# Altium PCB PCB1.PcbDoc (part 1 of 2)
Units mm, origin at the board's own origin, x right, y up, seen from the top; angles counter-clockwise.
Board outline 100 x 100 mm, 2 copper layers (Top Layer, Bottom Layer), stack 1.569 mm thick; 195 components, 137 nets, 444 pads, 96 vias.
Unrouted connection lines stored in the file: 120.
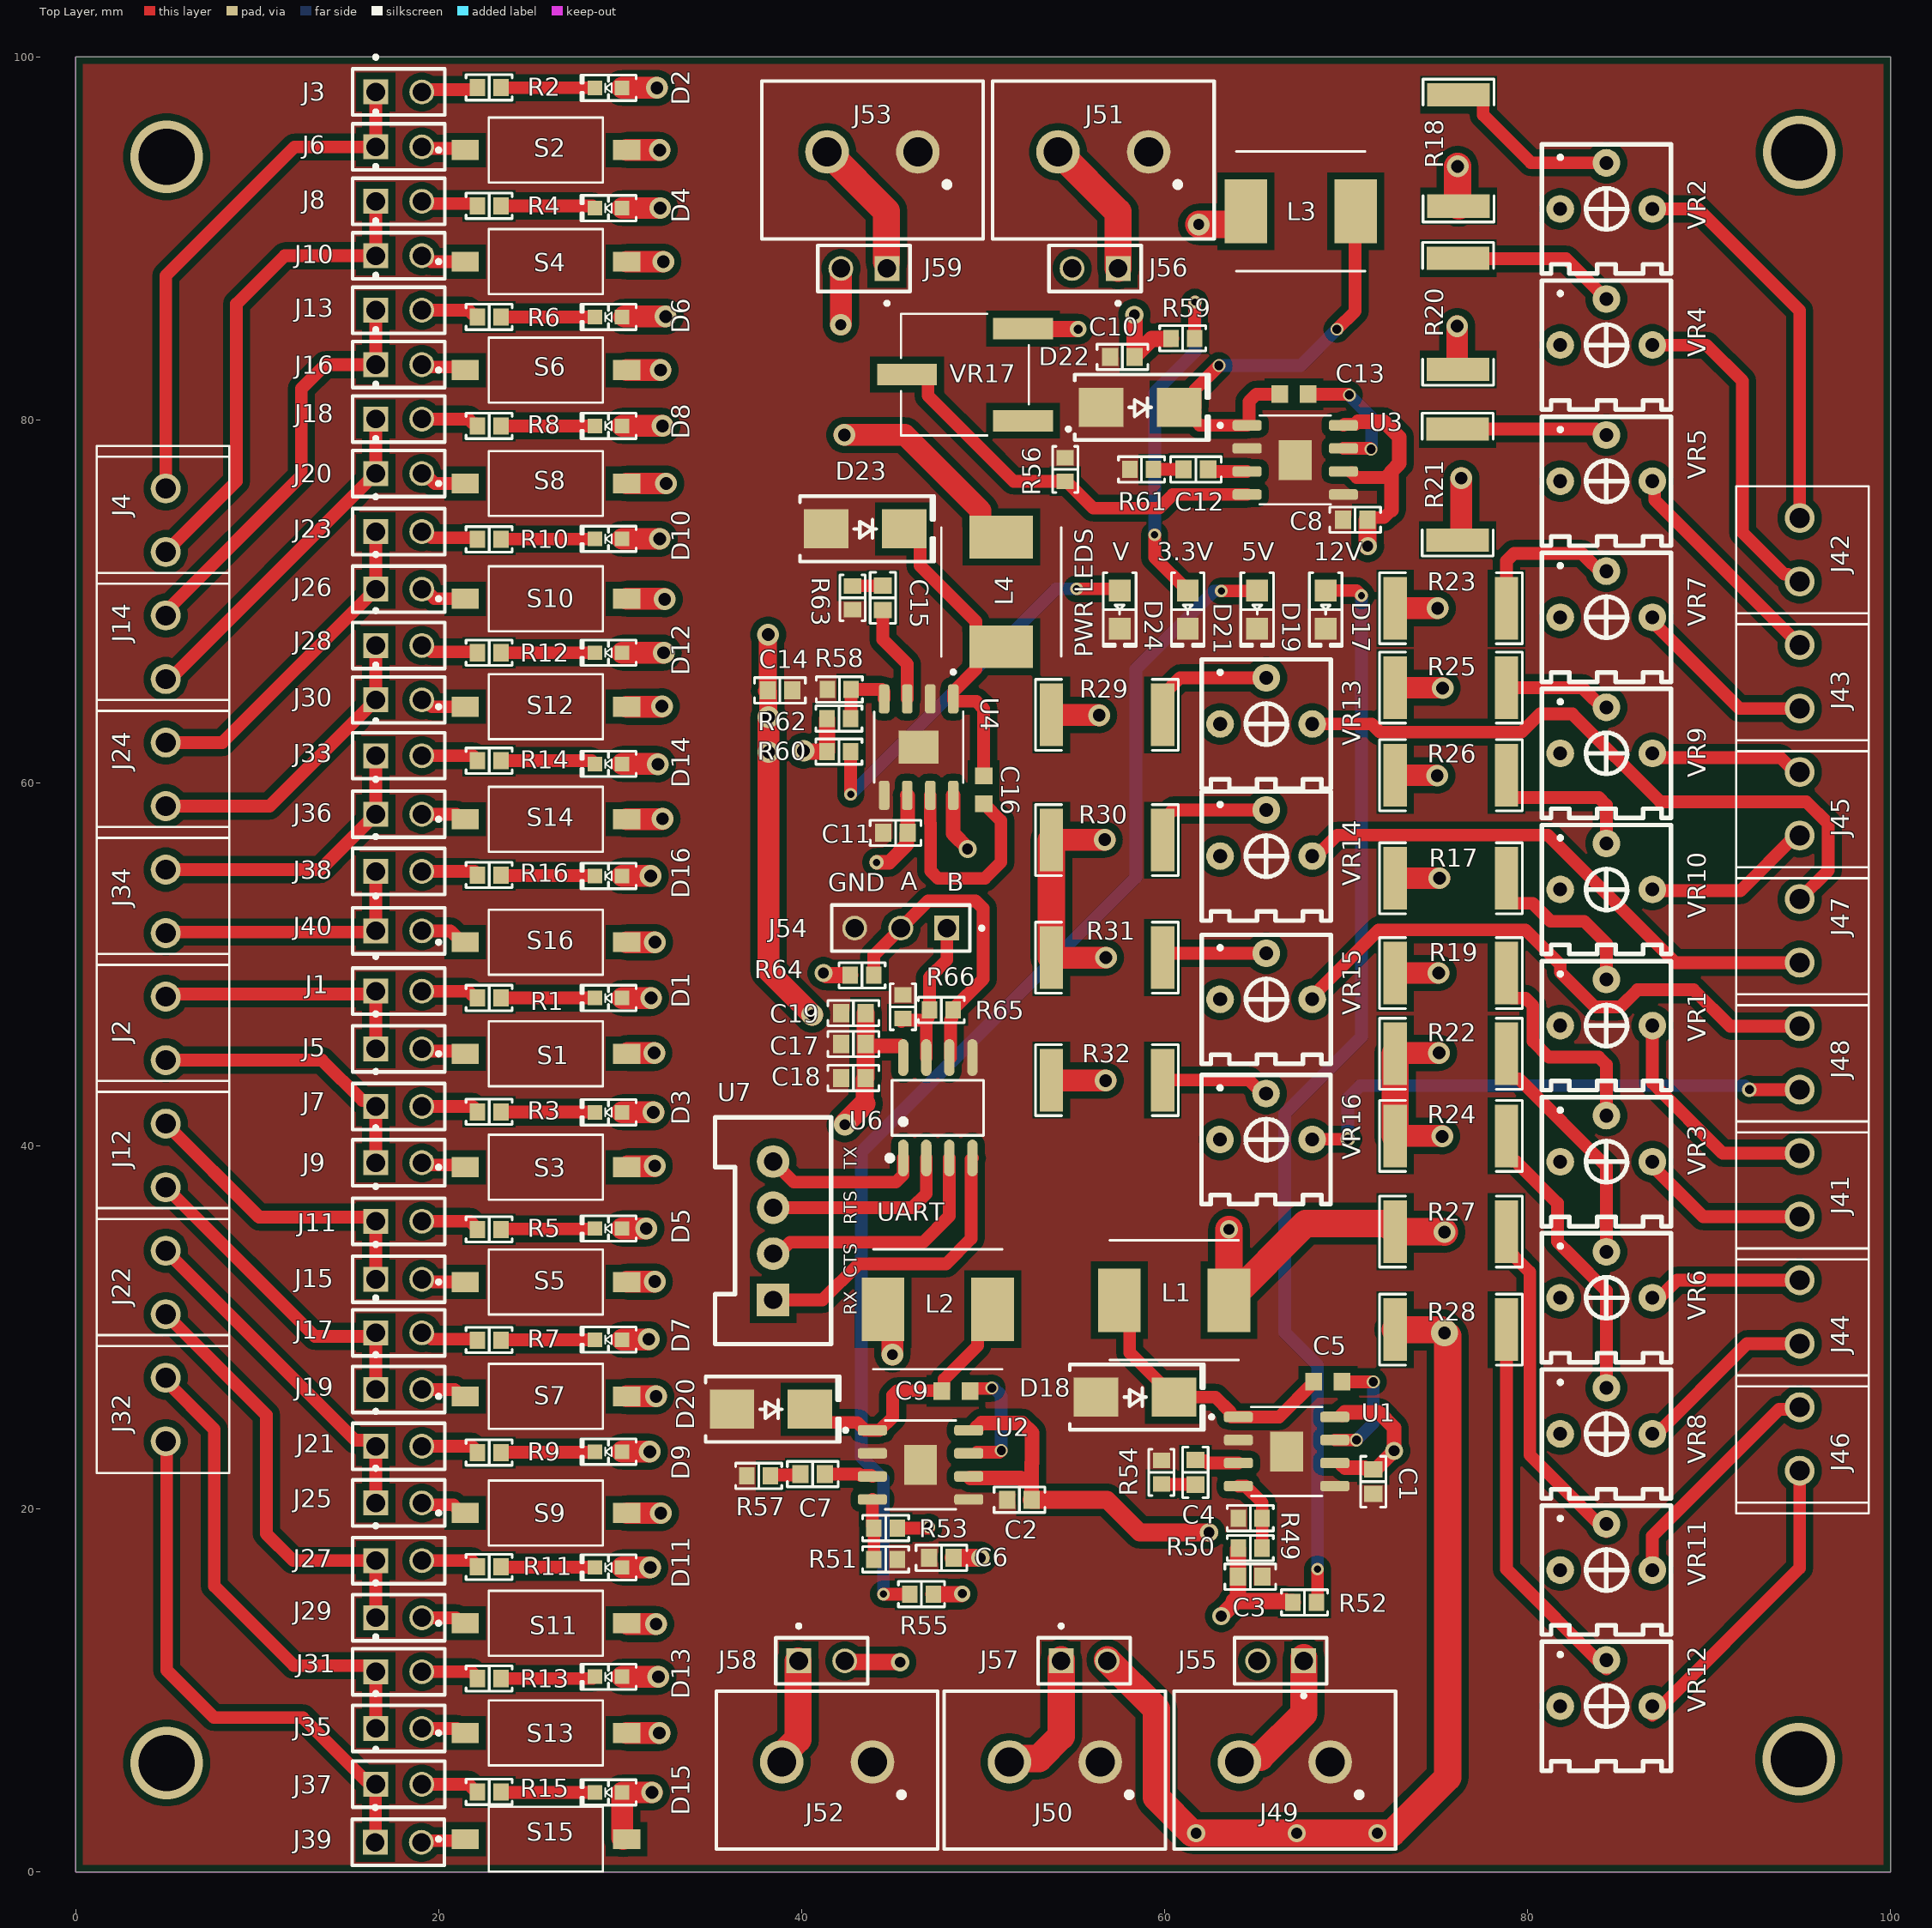
[diagram p0: Top Layer view]
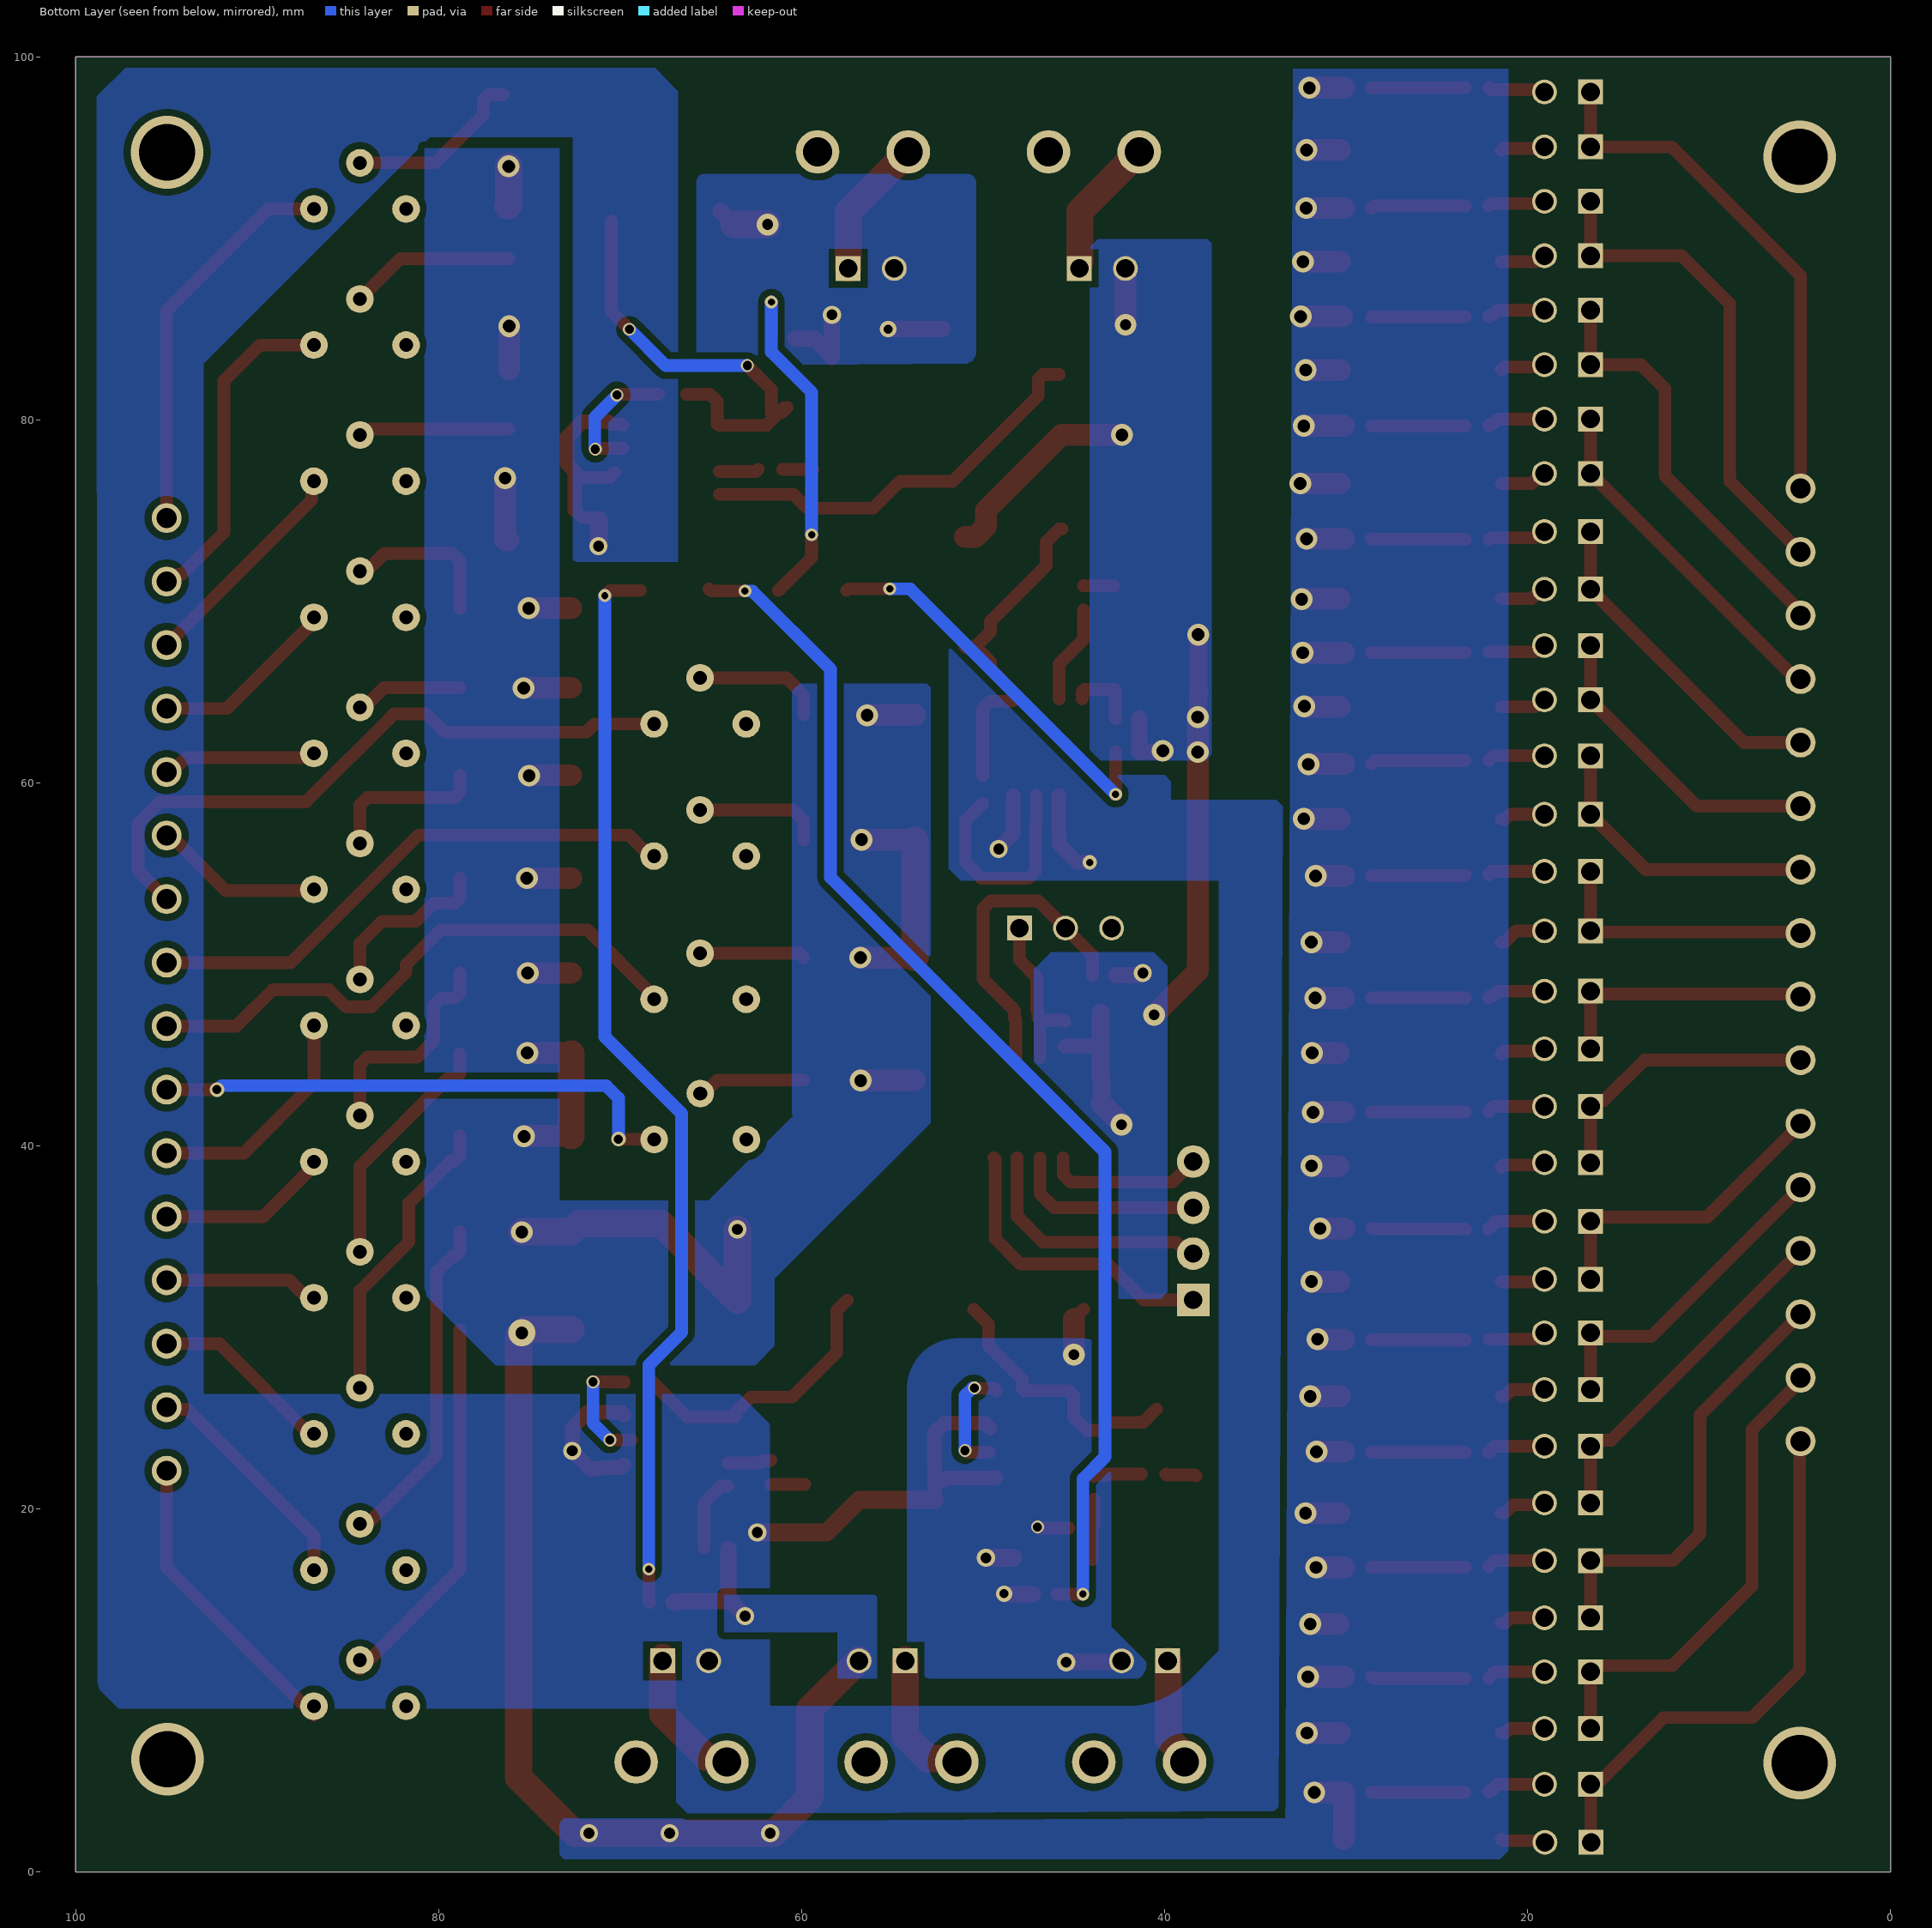
[diagram p1: Bottom Layer view, seen from below]
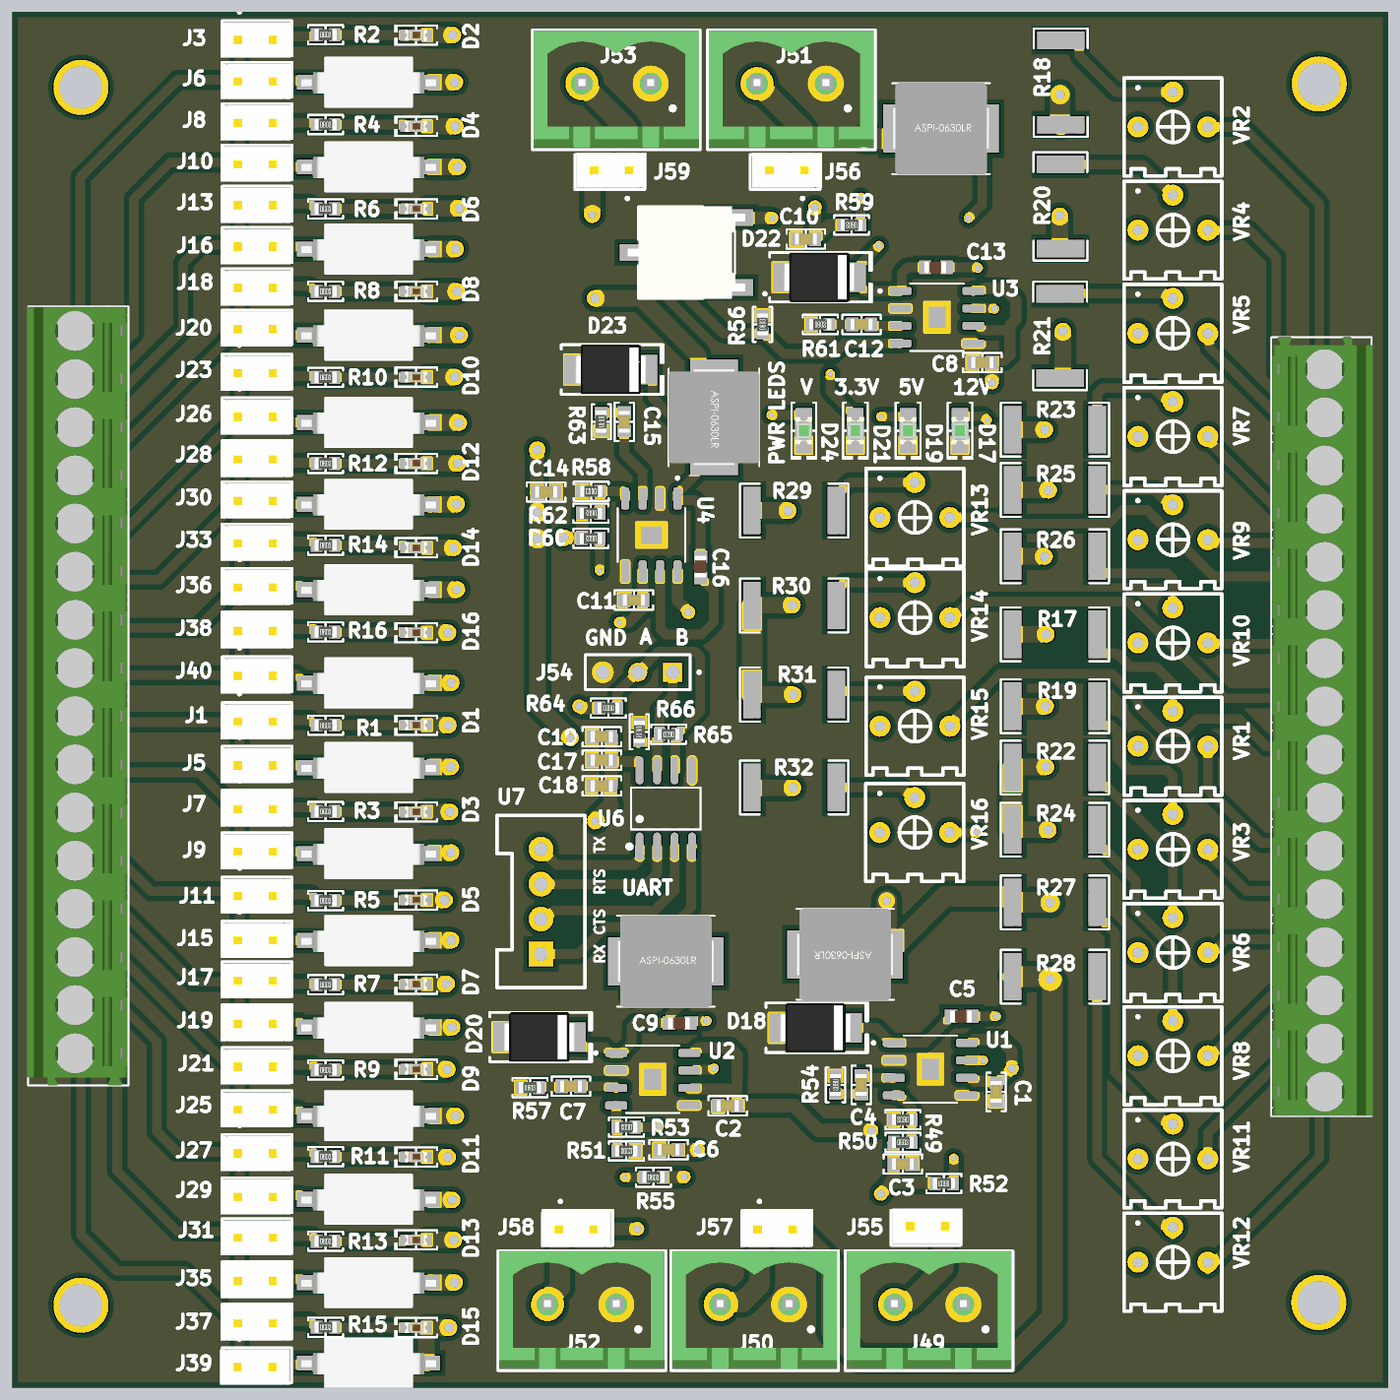
[diagram p3: 3D render of the assembled board from above, using the file's embedded part models]

## Layer stack, top to bottom
Top Solder: solder mask 0.0254, SM-001, Dk 4
Top Layer: signal copper 0.035
Dielectric 1: core 1.4986, Core-043, Dk 4.3
Bottom Layer: signal copper 0.035
Bottom Solder: solder mask 0.0254, SM-001, Dk 4

## Board outline
0,0 0,100 100,100 100,0

## Design rules (kind name [scope] priority, off if disabled: settings)
Clearance [All] p1: gap=0.381 ignorepadtopadclearanceinfootprint=FALSE except(0.2: Track-Hole; 0.3: Track-SMDPad; 0.4: Track-THPad; 0.5: Arc-Arc Arc-Track Arc-SMDPad Track-Track; 0.54: THPad-THPad; 0.6: Arc-THPad; 0.762: Arc-Via Track-Via Via-Via)
ComponentClearance [All] p1 off: gap=0.254 collisioncheckmode=3 verticalgap=0.254 showdistances=FALSE
HoleSize [All] p1: absolutevalues=TRUE maxlimit=6.3 minlimit=0.4 maxpercent=80.000 minpercent=20.000
HoleToHoleClearance [All] p1: gap=1 allowstackedmicrovias=TRUE
MinimumSolderMaskSliver [All] p1: minsoldermaskwidth=0.2
PermittedLayers [All] p1: toplayerpermitted=TRUE bottomlayerpermitted=TRUE
PlaneConnect [All] p1: planeconnectstyle=Direct reliefexpansion=0.508 reliefentries=4 reliefconductorwidth=0.254 reliefairgap=0.254
PolygonConnect [All] p1: connectstyle=Direct reliefconductorwidth=0.254 reliefentries=4 polygonreliefangle="90 Angle" airgapwidth=0.254
RoutingVias [All] p1: holewidth=0.6 width=0.9 viastyle="Through Hole" minholewidth=0.5 minwidth=0.8 maxholewidth=0.711 maxwidth=1.27
SilkToSilkClearance [All] p1: silktosilkclearance=0.2
SilkToSolderMaskClearance [IsPad] p1: minsilkscreentomaskgap=0.12 clearancetoexposedcopper=TRUE
SolderMaskExpansion [All] p1: expansion=0.102 istentingtop=FALSE soldermaskfromhole=TRUE
UnRoutedNet [All] p1: checkbadconnections=TRUE
Width [All] p1: maxlimit=1.5 minlimit=0.6 preferedwidth=0.7 bottomlayer_minwidth=0.7 bottomlayer_maxwidth=1 impedanceprofiledriven=TRUE impedanceprofileid={7F6526D8-940F-4284-9537-9007580CACC0} impedanceprofilevalue=50.000000 minimp=50.000000 maximp=50.000000 favimp=50.000000
22 further rules are at their usual default settings.

## Classes and differential pairs
component class rs485: C17 C18 C19 J54 R64 R65 R66 U6 U7

## Components (designator, comment, footprint, x,y, rotation, side; value= is the part's Value field where it differs from the comment)
C1 "10 µF" "CAP 0603_1608" 71.5,21.5 r270 top
C2 "10 µF" "CAP 0603_1608" 52,20.5 r180 top
C3 "47 µF" "CAP 0603_1608" 64.725,16.261 r180 top
C4 "6800 pF" "CAP 0603_1608" 61.7,22.011 r90 top
C5 "C0603C103J5REC7411" CAPC1608X87N 69,27 r0 top
C6 "47 µF" "CAP 0603_1608" 47.7,17.3 r0 top
C7 "6800 pF" "CAP 0603_1608" 40.605,21.915 r0 top
C8 "10 µF" "CAP 0603_1608" 70.5,74.5 r180 top
C9 "C0603C103J5REC7411" CAPC1608X87N 48.5,26.5 r0 top
C10 "47 µF" "CAP 0603_1608" 57.675,83.475 r0 top
C11 "10 µF" "CAP 0603_1608" 45.175,57.25 r180 top
C12 "6800 pF" "CAP 0603_1608" 61.725,77.275 r0 top
C13 "C0603C103J5REC7411" CAPC1608X87N 67.125,81.425 r0 top
C14 "47 µF" "CAP 0603_1608" 38.8,65.1 r180 top
C15 "6800 pF" "CAP 0603_1608" 44.475,70.2 r270 top
C16 "C0603C103J5REC7411" CAPC1608X87N 50.025,59.625 r270 top
C17 "10 µF" "CAP 0603_1608" 42.85,45.615 r0 top
C18 "0.1 µF" "CAP 0603_1608" 42.85,43.74 r0 top
C19 "0.1 µF" "CAP 0603_1608" 42.85,47.315 r0 top
D1 "Red" "LED 0603_1608 RED" 29.35,48.15 r180 top
D2 "Red" "LED 0603_1608 RED" 29.35,98.3 r180 top
D3 "Red" "LED 0603_1608 RED" 29.35,41.85 r180 top
D4 "Red" "LED 0603_1608 RED" 29.35,91.675 r180 top
D5 "Red" "LED 0603_1608 RED" 29.35,35.45 r180 top
D6 "Red" "LED 0603_1608 RED" 29.35,85.675 r180 top
D7 "Red" "LED 0603_1608 RED" 29.35,29.325 r180 top
D8 "Red" "LED 0603_1608 RED" 29.35,79.675 r180 top
D9 "Red" "LED 0603_1608 RED" 29.35,23.15 r180 top
D10 "Red" "LED 0603_1608 RED" 29.35,73.45 r180 top
D11 "Red" "LED 0603_1608 RED" 29.35,16.775 r180 top
D12 "Red" "LED 0603_1608 RED" 29.35,67.175 r180 top
D13 "Red" "LED 0603_1608 RED" 29.35,10.75 r180 top
D14 "Red" "LED 0603_1608 RED" 29.35,61.05 r180 top
D15 "Red" "LED 0603_1608 RED" 29.35,4.375 r180 top
D16 "Red" "LED 0603_1608 RED" 29.35,54.875 r180 top
D17 "Green" "LED 0805_2012 GREEN" 68.875,69.55 r270 top
D18 "MBRS140T3G" "DO214AA SMB" 58.375,26.161 r0 top
D19 "Green" "LED 0805_2012 GREEN" 65.1,69.55 r270 top
D20 "MBRS140T3G" "DO214AA SMB" 38.305,25.49 r0 top
D21 "Green" "LED 0805_2012 GREEN" 61.275,69.55 r270 top
D22 "MBRS140T3G" "DO214AA SMB" 58.65,80.7 r0 top
D23 "MBRS140T3G" "DO214AA SMB" 43.5,74 r0 top
D24 "Green" "LED 0805_2012 GREEN" 57.525,69.55 r270 top
J1 "HW-01-11-G-D-209-080" SAMTEC_HW-01-11-G-D-209-080#1 16.525,48.525 r270 top
J2 "691214110002S" 691214110002S 4.95,46.475 r90 top
J3 "HW-01-11-G-D-209-080" SAMTEC_HW-01-11-G-D-209-080#1 16.525,98.075 r270 top
J4 "691214110002S" 691214110002S 4.95,74.475 r90 top
J5 "HW-01-11-G-D-209-080" SAMTEC_HW-01-11-G-D-209-080#1 16.525,45.35 r270 top
J6 "HW-01-11-G-D-209-080" SAMTEC_HW-01-11-G-D-209-080#1 16.525,95.05 r270 top
J7 "HW-01-11-G-D-209-080" SAMTEC_HW-01-11-G-D-209-080#1 16.525,42.175 r270 top
J8 "HW-01-11-G-D-209-080" SAMTEC_HW-01-11-G-D-209-080#1 16.525,92.05 r270 top
J9 "HW-01-11-G-D-209-080" SAMTEC_HW-01-11-G-D-209-080#1 16.525,39.075 r270 top
J10 "HW-01-11-G-D-209-080" SAMTEC_HW-01-11-G-D-209-080#1 16.525,89.05 r270 top
J11 "HW-01-11-G-D-209-080" SAMTEC_HW-01-11-G-D-209-080#1 16.525,35.85 r270 top
J12 "691214110002S" 691214110002S 4.95,39.475 r90 top
J13 "HW-01-11-G-D-209-080" SAMTEC_HW-01-11-G-D-209-080#1 16.525,86.05 r270 top
J14 "691214110002S" 691214110002S 4.95,67.475 r90 top
J15 "HW-01-11-G-D-209-080" SAMTEC_HW-01-11-G-D-209-080#1 16.525,32.65 r270 top
J16 "HW-01-11-G-D-209-080" SAMTEC_HW-01-11-G-D-209-080#1 16.525,83.05 r270 top
J17 "HW-01-11-G-D-209-080" SAMTEC_HW-01-11-G-D-209-080#1 16.525,29.7 r270 top
J18 "HW-01-11-G-D-209-080" SAMTEC_HW-01-11-G-D-209-080#1 16.525,80.05 r270 top
J19 "HW-01-11-G-D-209-080" SAMTEC_HW-01-11-G-D-209-080#1 16.525,26.575 r270 top
J20 "HW-01-11-G-D-209-080" SAMTEC_HW-01-11-G-D-209-080#1 16.525,77.05 r270 top
J21 "HW-01-11-G-D-209-080" SAMTEC_HW-01-11-G-D-209-080#1 16.525,23.45 r270 top
J22 "691214110002S" 691214110002S 4.95,32.475 r90 top
J23 "HW-01-11-G-D-209-080" SAMTEC_HW-01-11-G-D-209-080#1 16.525,73.85 r270 top
J24 "691214110002S" 691214110002S 4.95,60.475 r90 top
J25 "HW-01-11-G-D-209-080" SAMTEC_HW-01-11-G-D-209-080#1 16.525,20.325 r270 top
J26 "HW-01-11-G-D-209-080" SAMTEC_HW-01-11-G-D-209-080#1 16.525,70.675 r270 top
J27 "HW-01-11-G-D-209-080" SAMTEC_HW-01-11-G-D-209-080#1 16.525,17.15 r270 top
J28 "HW-01-11-G-D-209-080" SAMTEC_HW-01-11-G-D-209-080#1 16.525,67.575 r270 top
J29 "HW-01-11-G-D-209-080" SAMTEC_HW-01-11-G-D-209-080#1 16.525,14 r270 top
J30 "HW-01-11-G-D-209-080" SAMTEC_HW-01-11-G-D-209-080#1 16.525,64.575 r270 top
J31 "HW-01-11-G-D-209-080" SAMTEC_HW-01-11-G-D-209-080#1 16.525,11.025 r270 top
J32 "691214110002S" 691214110002S 4.95,25.475 r90 top
J33 "HW-01-11-G-D-209-080" SAMTEC_HW-01-11-G-D-209-080#1 16.525,61.5 r270 top
J34 "691214110002S" 691214110002S 4.95,53.475 r90 top
J35 "HW-01-11-G-D-209-080" SAMTEC_HW-01-11-G-D-209-080#1 16.525,7.9 r270 top
J36 "HW-01-11-G-D-209-080" SAMTEC_HW-01-11-G-D-209-080#1 16.525,58.275 r270 top
J37 "HW-01-11-G-D-209-080" SAMTEC_HW-01-11-G-D-209-080#1 16.525,4.825 r270 top
J38 "HW-01-11-G-D-209-080" SAMTEC_HW-01-11-G-D-209-080#1 16.525,55.125 r270 top
J39 "HW-01-11-G-D-209-080" SAMTEC_HW-01-11-G-D-209-080#1 16.5,1.625 r270 top
J40 "HW-01-11-G-D-209-080" SAMTEC_HW-01-11-G-D-209-080#1 16.525,51.85 r270 top
J41 "691214110002S" 691214110002S 95,37.85 r270 top
J42 "691214110002S" 691214110002S 95,72.85 r270 top
J43 "691214110002S" 691214110002S 95,65.85 r270 top
J44 "691214110002S" 691214110002S 95,30.85 r270 top
J45 "691214110002S" 691214110002S 95,58.85 r270 top
J46 "691214110002S" 691214110002S 95,23.85 r270 top
J47 "691214110002S" 691214110002S 95,51.85 r270 top
J48 "691214110002S" 691214110002S 95,44.85 r270 top
J49 "691311700102" 691311700102 66.625,6.05 r180 top
J50 "691311700102" 691311700102 53.95,6.05 r180 top
J51 "691311700102" 691311700102 56.625,94.775 r180 top
J52 "691311700102" 691311700102 41.4,6.05 r180 top
J53 "691311700102" 691311700102 43.9,94.775 r180 top
J54 "TSW-103-26-F-S" SAMTEC_TSW-103-26-F-S 48,52 r180 top
J55 "HW-01-11-G-D-209-080" SAMTEC_HW-01-11-G-D-209-080#2 67.665,11.625 r90 top
J56 "HW-01-11-G-D-209-080" SAMTEC_HW-01-11-G-D-209-080#1 57.44,88.35 r90 top
J57 "HW-01-11-G-D-209-080" SAMTEC_HW-01-11-G-D-209-080#1 54.3,11.625 r270 top
J58 "HW-01-11-G-D-209-080" SAMTEC_HW-01-11-G-D-209-080#1 39.835,11.625 r270 top
J59 "HW-01-11-G-D-209-080" SAMTEC_HW-01-11-G-D-209-080#1 44.7,88.35 r90 top
L1 "ASPI-0630LR-150M-T15" IND_ASPI-0630LR-150M-T15 60.525,31.5 r180 top
L2 "ASPI-0630LR-150M-T15" IND_ASPI-0630LR-150M-T15 47.5,31 r0 top
L3 "ASPI-0630LR-150M-T15" IND_ASPI-0630LR-150M-T15 67.5,91.5 r0 top
L4 "ASPI-0630LR-150M-T15" IND_ASPI-0630LR-150M-T15 51,70.525 r270 top
R1 "1 kOhms" "RES 0603_1608" 22.775,48.15 r0 top
R2 "1 kOhms" "RES 0603_1608" 22.775,98.325 r0 top
R3 "1 kOhms" "RES 0603_1608" 22.775,41.875 r0 top
R4 "1 kOhms" "RES 0603_1608" 22.775,91.8 r0 top
R5 "1 kOhms" "RES 0603_1608" 22.775,35.4 r0 top
R6 "1 kOhms" "RES 0603_1608" 22.775,85.675 r0 top
R7 "1 kOhms" "RES 0603_1608" 22.775,29.3 r0 top
R8 "1 kOhms" "RES 0603_1608" 22.775,79.675 r0 top
R9 "1 kOhms" "RES 0603_1608" 22.775,23.1 r0 top
R10 "1 kOhms" "RES 0603_1608" 22.775,73.425 r0 top
R11 "1 kOhms" "RES 0603_1608" 22.775,16.8 r0 top
R12 "1 kOhms" "RES 0603_1608" 22.775,67.175 r0 top
R13 "1 kOhms" "RES 0603_1608" 22.775,10.65 r0 top
R14 "1 kOhms" "RES 0603_1608" 22.775,61.225 r0 top
R15 "1 kOhms" "RES 0603_1608" 22.775,4.4 r0 top
R16 "1 kOhms" "RES 0603_1608" 22.775,54.925 r0 top
R17 "422 Ohms" RES_422 75.775,54.75 r0 top
R18 "422 Ohms" RES_422 76.2,94.85 r90 top
R19 "422 Ohms" RES_422 75.775,49.525 r0 top
R20 "422 Ohms" RES_422 76.175,85.85 r90 top
R21 "422 Ohms" RES_422 76.15,76.441 r90 top
R22 "422 Ohms" RES_422 75.775,45.075 r0 top
R23 "422 Ohms" RES_422 75.775,69.625 r0 top
R24 "422 Ohms" RES_422 75.775,40.55 r0 top
R25 "422 Ohms" RES_422 75.775,65.25 r0 top
R26 "422 Ohms" RES_422 75.775,60.425 r0 top
R27 "422 Ohms" RES_422 75.775,35.275 r0 top
R28 "422 Ohms" RES_422 75.775,29.875 r0 top
R29 "422 Ohms" RES_422 56.825,63.75 r0 top
R30 "422 Ohms" RES_422 56.825,56.85 r0 top
R31 "422 Ohms" RES_422 56.825,50.375 r0 top
R32 "422 Ohms" RES_422 56.825,43.625 r0 top
R49 "10 kOhms" "RES 0603_1608" 64.725,19.486 r180 top
R50 "110 kOhms" "RES 0603_1608" 64.725,17.836 r0 top
R51 "30 kOhms" "RES 0603_1608" 44.63,17.215 r0 top
R52 "560 Ohms" "RES 0603_1608" 67.71,14.843 r180 top
R53 "120 kOhms" "RES 0603_1608" 44.63,18.94 r180 top
R54 "10 kOhms" "RES 0603_1608" 59.825,22.011 r270 top
R55 "165 Ohms" "RES 0603_1608" 46.6,15.3 r0 top
R56 "30 kOhms" "RES 0603_1608" 54.525,77.275 r90 top
R57 "10 kOhms" "RES 0603_1608" 37.63,21.815 r0 top
R58 "27 kOhms" "RES 0603_1608" 42.075,65.15 r180 top
R59 "866 Ohms" "RES 0603_1608" 61,84.5 r180 top
R60 "62 kOhms" "RES 0603_1608" 42.05,63.55 r180 top
R61 "10 kOhms" "RES 0603_1608" 58.725,77.275 r0 top
R62 "110 Ohms" "RES 0603_1608" 42.05,61.725 r180 top
R63 "10 kOhms" "RES 0603_1608" 42.8,70.2 r90 top
R64 "475 Ohms" "RES 0603_1608" 43.325,49.4 r180 top
R65 "140 Ohms" "RES 0603_1608" 47.697,47.49 r180 top
R66 "475 Ohms" "RES 0603_1608" 45.575,47.662 r270 top
S1 "KAE01SGGT" SW_KAE01SGGT 25.9,45.075 r0 top
S2 "KAE01SGGT" SW_KAE01SGGT 25.9,94.875 r0 top
S3 "KAE01SGGT" SW_KAE01SGGT 25.9,38.825 r0 top
S4 "KAE01SGGT" SW_KAE01SGGT 25.9,88.725 r0 top
S5 "KAE01SGGT" SW_KAE01SGGT 25.9,32.5 r0 top
S6 "KAE01SGGT" SW_KAE01SGGT 25.9,82.75 r0 top
S7 "KAE01SGGT" SW_KAE01SGGT 25.9,26.2 r0 top
S8 "KAE01SGGT" SW_KAE01SGGT 25.9,76.5 r0 top
S9 "KAE01SGGT" SW_KAE01SGGT 25.9,19.775 r0 top
S10 "KAE01SGGT" SW_KAE01SGGT 25.9,70.15 r0 top
S11 "KAE01SGGT" SW_KAE01SGGT 25.9,13.7 r0 top
S12 "KAE01SGGT" SW_KAE01SGGT 25.9,64.2 r0 top
S13 "KAE01SGGT" SW_KAE01SGGT 25.9,7.65 r0 top
S14 "KAE01SGGT" SW_KAE01SGGT 25.9,58 r0 top
S15 "KAE01SGGT" SW_KAE01SGGT 25.9,1.8 r0 top
S16 "KAE01SGGT" SW_KAE01SGGT 25.9,51.225 r0 top
U1 "BD9876AEFJ-E2" SOIC127P600X100-9N 66.725,23.161 r0 top
U2 "BD9876AEFJ-E2" SOIC127P600X100-9N 46.55,22.425 r0 top
U3 "BD9876AEFJ-E2" SOIC127P600X100-9N 67.2,77.8 r0 top
U4 "BD9876AEFJ-E2" SOIC127P600X100-9N 46.45,61.975 r270 top
U6 "SP3485" SP3485 47.5,42.1 r0 top
U7 "Con1x4_WireToWire" Con1x4_WireToWire 38.425,31.52 r270 top
VR1 "CT6EP202" CT6EP202 84.345,46.629 r0 top
VR2 "CT6EP202" CT6EP202 84.345,91.629 r0 top
VR3 "CT6EP202" CT6EP202 84.345,39.129 r0 top
VR4 "CT6EP202" CT6EP202 84.345,84.129 r0 top
VR5 "CT6EP202" CT6EP202 84.345,76.629 r0 top
VR6 "CT6EP202" CT6EP202 84.345,31.629 r0 top
VR7 "CT6EP202" CT6EP202 84.345,69.129 r0 top
VR8 "CT6EP202" CT6EP202 84.345,24.129 r0 top
VR9 "CT6EP202" CT6EP202 84.345,61.629 r0 top
VR10 "CT6EP202" CT6EP202 84.345,54.129 r0 top
VR11 "CT6EP202" CT6EP202 84.345,16.629 r0 top
VR12 "CT6EP202" CT6EP202 84.345,9.129 r0 top
VR13 "CT6EP202" CT6EP202 65.6,63.25 r0 top
VR14 "CT6EP202" CT6EP202 65.6,55.97 r0 top
VR15 "CT6EP202" CT6EP202 65.6,48.077 r0 top
VR16 "CT6EP202" CT6EP202 65.59,40.35 r0 top
VR17 "3361P-1-504GLF" TRIM_3361P-1-504GLF 49,82.5 r180 top

## Footprints (in the part's own frame and the unit in brackets; to place one, negate y for a bottom-side part, rotate by r counter-clockwise, add the part's x,y. Pads: shape width x height; smd on the part's side, far side on the other; paste and mask are expansions set on the pad)
691214110002S [mm]
  round 1.65 hole 1.1: 1(-1.75,0) 2(1.75,0)
  silkscreen extent -3.5,-3.5 4.1,3.8, body extent -3.52,-3.42 4.08,3.88, height 9.1
691311700102 [mm]
  round 2.4 hole 1.6: 1(-2.5,0) 2(2.5,0)
  silkscreen extent -6.1,-3.9 6.1,4.8, body extent -6,-3.87 6,4.63, height 6
"CAP 0603_1608" [mm] "Chip Capacitor, 2-Leads, Body 1.60x0.80mm, IPC Medium Density"
  rect 0.9x1 smd: 1(-0.675,0) 2(0.675,0)
  silkscreen extent -1.4,-0.7 1.4,0.7, body extent -0.8,-0.41 0.8,0.41, height 0.82
CAPC1608X87N [mm]
  rect 0.92x0.97 smd: 1(-0.775,0) 2(0.775,0)
  body extent -0.85,-0.44 0.75,0.43, height 0.81
Con1x4_WireToWire [mm]
  rect 1.8x1.8 hole 1: 1(0,0)
  round 1.8 hole 1: 2(-2.54,0) 3(-5.08,0) 4(-7.62,0)
  silkscreen extent -10.06,-3.2 2.44,3.2
CT6EP202 [mil]
  round 60 hole 30: 1(-100,0) 2(0,100) 3(100,0)
  silkscreen extent -140,-140 140,140
"DO214AA SMB" [mm] "Molded Diode, 2-Leads, Body 4.31x3.62mm, IPC Medium Density"
  rect 2.45x2.15 smd: 1(-2.15,0) 2(2.15,0)
  silkscreen extent -3.6,-1.8 3.8,1.8, body extent -2.6,-1.8 2.6,1.8, height 2.4
IND_ASPI-0630LR-150M-T15 [mm]
  rect 2.35x3.5 smd: 1(-3.025,0) 2(3.025,0)
  silkscreen extent -3.55,-3.3 3.55,3.3, body extent -3.6,-3.32 3.6,3.32, height 1.35
"LED 0603_1608 RED" [mm] "Chip Diode, 2-Leads, Body 1.60x0.80mm, IPC Medium Density"
  rect 0.8x0.8 smd: 1(-0.75,0) 2(0.75,0)
  silkscreen extent -1.52,-0.7 1.52,0.7, body extent -0.8,-0.4 0.8,0.4, height 0.53
"LED 0805_2012 GREEN" [mm] "Chip Diode, 2-Leads, Body 2.00x1.25mm, IPC Medium Density"
  rect 1.2x1.2 smd: 1(-1.05,0) 2(1.05,0)
  silkscreen extent -2.03,-0.9 2.03,0.9, body extent -1,-0.62 1,0.63, height 0.9
"RES 0603_1608" [mm] "Chip Resistor, 2-Leads, Body 1.60x0.80mm, IPC Medium Density"
  rect 0.85x0.95 smd: 1(-0.65,0) 2(0.65,0)
  silkscreen extent -1.27,-0.7 1.27,0.7, body extent -0.8,-0.4 0.8,0.4, height 0.45
RES_422 [mm]
  rect 1.283x3.456 smd: 1(-3.066,0) 2(3.066,0)
  silkscreen extent -3.94,-1.96 3.94,1.96
SAMTEC_HW-01-11-G-D-209-080#1 [mm]
  rect 1.37x1.37 / inner round 1.37 / far side rect 1.37x1.37 hole 1.02: 01(0,0)
  round 1.37 hole 1.02: 02(0,2.54)
  silkscreen extent -2.02,-1.27 1.27,3.81, body extent -1.14,-1.4 1.4,3.68, height 21.6
SAMTEC_HW-01-11-G-D-209-080#2 [mm]
  rect 1.37x1.37 hole 1.02: 01(0,0)
  round 1.37 hole 1.02: 02(0,2.54)
  silkscreen extent -2.02,-1.27 1.27,3.81, body extent -1.14,-1.4 1.4,3.68, height 21.6
SAMTEC_TSW-103-26-F-S [mm]
  rect 1.37x1.37 hole 1.02: 01(0,0)
  round 1.37 hole 1.02: 02(2.54,0) 03(5.08,0)
  silkscreen extent -2.02,-1.27 6.35,1.27
SOIC127P600X100-9N [mm]
  rrect50% 1.61x0.58 smd: 1(-2.655,1.905) 2(-2.655,0.635) 3(-2.655,-0.635) 4(-2.655,-1.905) 5(2.655,-1.905) 6(2.655,-0.635) 7(2.655,0.635) 8(2.655,1.905)
  rect 1.8x2.2 smd paste-2: 9(0,0)
  silkscreen extent -4.23,-2.45 1.95,2.45
SP3485 [mm]
  oval 0.574x2.036 smd: 1(-1.905,-2.768) 2(-0.635,-2.768) 3(0.635,-2.768) 4(1.905,-2.768) 5(1.905,2.768) 6(0.635,2.768) 7(-0.635,2.768) 8(-1.905,2.768)
  silkscreen extent -2.79,-2.92 2.53,1.52
SW_KAE01SGGT [mm]
  rect 1.5x1.1 smd: 1(-4.45,0) 2(4.45,0)
  silkscreen extent -6.01,-1.79 3.15,1.79, body extent -4.9,-1.79 4.9,1.79, height 3.13
TRIM_3361P-1-504GLF [mm]
  rect 3.3x1.19 smd: 1(-3.2,2.54) 2(3.2,0) 3(-3.2,-2.54)
  silkscreen extent -5.8,-3.35 3.52,3.35, body extent -4.27,-3.35 4.27,3.35, height 5.84

## Part data
C1 C2 C8 C11: library part 0603DD106MAT2A, "CAP CER 10UF 35V X5R 0603", Device Package="0603 (1608 Metric)", Manufacturer="KYOCERA AVX", Operating Temperature="-55°C ~ 85°C", Supplier Part Number 1=478-0603DD106MAT2ACT-ND, Temperature Coefficient=X5R, Tolerance=±20%, Voltage - Rated=35V, Applications="General Purpose", Capacitance="10 µF", ComponentLink2Description="DigiKey Link", ComponentLink2URL=https://www.digikey.com/en/products/detail/kyocera-avx/0603DD106MAT2A/16602926, lastupdated="08/03/2023 8:07:23 pm", Lifecycle Status=Active, Minimum Order=1, Mounting Type="Surface Mount, MLCC", Package / Case="0603 (1608 Metric)", Packaging=TapeAndReel, Part Number=0603DD106MAT2A, Part Status=Active, partid=46895, price=0.05, Series=-, Size / Dimension="0.063\" L x 0.031\" W (1.60mm x 0.80mm)", Supplier 1=DigiKey
C3 C6 C10 C14: library part GRM188R60J476ME15D, "CAP CER 47UF 6.3V X5R 0603", Device Package="0603 (1608 Metric)", Manufacturer="Murata Electronics", Operating Temperature="-55°C ~ 85°C", Supplier Part Number 1=490-13247-1-ND, Temperature Coefficient=X5R, Tolerance=±20%, Voltage - Rated=6.3V, Applications="General Purpose", Capacitance="47 µF", ComponentLink1Description=Datasheet, ComponentLink1URL=https://www.murata.com/~/media/webrenewal/support/library/catalog/products/capacitor/mlcc/c02e.ashx?la=en-us, ComponentLink2Description="DigiKey Link", ComponentLink2URL=https://www.digikey.com/en/products/detail/murata-electronics/GRM188R60J476ME15D/5877410, lastupdated="08/03/2023 8:08:50 pm", Lifecycle Status=Active, Minimum Order=1, Mounting Type="Surface Mount, MLCC", Package / Case="0603 (1608 Metric)", Packaging=TapeAndReel, Part Number=GRM188R60J476ME15D, Part Status=Active, partid=5468, price=0.10, Series=GRM, Size / Dimension="0.063\" L x 0.031\" W (1.60mm x 0.80mm)", Supplier 1=DigiKey, Thickness (Max)="0.039\" (1.00mm)"
C4 C7 C12 C15: library part EMK107SD682JA-T, "CAP CER 6800PF 16V 0603", Device Package="0603 (1608 Metric)", Manufacturer="Taiyo Yuden", Operating Temperature="-55°C ~ 125°C", Supplier Part Number 1=587-1089-1-ND, Tolerance=±5%, Voltage - Rated=16V, Applications="General Purpose", Capacitance="6800 pF", ComponentLink1Description=Datasheet, ComponentLink1URL=http://www.yuden.co.jp/productdata/catalog/mlcc07_e.pdf, ComponentLink2Description="DigiKey Link", ComponentLink2URL=https://www.digikey.com/en/products/detail/taiyo-yuden/EMK107SD682JA-T/930441, Features="Low Distortion", lastupdated="08/03/2023 8:08:44 pm", Lifecycle Status=Active, Minimum Order=1, Mounting Type="Surface Mount, MLCC", Package / Case="0603 (1608 Metric)", Packaging=TapeAndReel, Part Number=EMK107SD682JA-T, Part Status=Active, partid=7463, price=0.07, Series=CFCAP™, Size / Dimension="0.063\" L x 0.031\" W (1.60mm x 0.80mm)", Supplier 1=DigiKey, Thickness (Max)="0.035\" (0.90mm)"
C5 C9 C13 C16: "10000pF Â±5% 50V Ceramic Capacitor X7R 0603 (1608 Metric)", Package="1608 KEMET", Availability=Unavailable, DigiKey-Purchase-URL=https://snapeda.com/shop?store=DigiKey&id=2066766, MF=KEMET, MP=C0603C103J5REC7411, price=None, SnapEDA_Link=https://www.snapeda.com/parts/C0603C103J5REC7411/KEMET/view-part/2066766/?ref=snap
C17: library part GRM188R60J106ME47D, "CAP CER 10UF 6.3V X5R 0603", Device Package="0603 (1608 Metric)", Manufacturer="Murata Electronics", Operating Temperature="-55°C ~ 85°C", Supplier Part Number 1=490-3896-1-ND, Temperature Coefficient=X5R, Tolerance=±20%, Voltage - Rated=6.3V, Applications="General Purpose", Capacitance="10 µF", ComponentLink1Description=Datasheet, ComponentLink1URL=https://www.murata.com/~/media/webrenewal/support/library/catalog/products/capacitor/mlcc/c02e.ashx?la=en-us, ComponentLink2Description="DigiKey Link", ComponentLink2URL=https://www.digikey.com/en/products/detail/murata-electronics/GRM188R60J106ME47D/965910, lastupdated="08/03/2023 8:08:59 pm", Lifecycle Status=Active, Minimum Order=1, Mounting Type="Surface Mount, MLCC", Package / Case="0603 (1608 Metric)", Packaging=TapeAndReel, Part Number=GRM188R60J106ME47D, Part Status=Active, partid=2351, price=0.02, Series=GRM, Size / Dimension="0.063\" L x 0.031\" W (1.60mm x 0.80mm)", Supplier 1=DigiKey, Thickness (Max)="0.035\" (0.90mm)"
C18 C19: library part 6R3X14W104MV4T, "CAP CER 0.1UF 6.3V X7R 0603", Device Package="0603 (1608 Metric)", Manufacturer="Johanson Dielectrics Inc.", Operating Temperature="-55°C ~ 125°C", Supplier Part Number 1=709-1009-1-ND, Temperature Coefficient=X7R, Tolerance=±20%, Voltage - Rated=6.3V, Applications="Bypass, Decoupling", Capacitance="0.1 µF", ComponentLink1Description=Datasheet, ComponentLink1URL=https://www.johansondielectrics.com/downloads/x2y-filter-and-decoupling-capacitors.pdf, ComponentLink2Description="DigiKey Link", ComponentLink2URL=https://www.digikey.com/en/products/detail/johanson-dielectrics-inc/6R3X14W104MV4T/1556331, Features="Low ESL (X2Y)", lastupdated="08/03/2023 8:08:58 pm", Lifecycle Status=Active, Minimum Order=1, Mounting Type="Surface Mount, MLCC", Package / Case="0603 (1608 Metric)", Packaging=TapeAndReel, Part Number=6R3X14W104MV4T, Part Status=Active, partid=2650, price=0.08, Series=X2Y®, Size / Dimension="0.064\" L x 0.035\" W (1.63mm x 0.89mm)", Supplier 1=DigiKey, Thickness (Max)="0.026\" (0.66mm)"
D1 D2 D3 D4 D5 D6 D7 D8 D9 D10 D11 D12 D13 D14 D15 D16: library part 19-213SDRC/S259/TR8, "LED RED CLEAR 2SMD", Current - Test=10mA, Device Package="0603 (1608 Metric)", Lens Color=Colorless, Manufacturer="Everlight Electronics Co Ltd", Supplier Device Package=2-SMD, Supplier Part Number 1=1080-1580-1-ND, Voltage - Forward (Vf) (Typ)=2V, Color=Red, ComponentLink1Description=Datasheet, ComponentLink1URL=//media.digikey.com/pdf/Data%20Sheets/Everlight%20PDFs/19-213SDRC-S259-TR8.pdf, ComponentLink2Description="DigiKey Link", ComponentLink2URL=http://digikey.com/product-detail/en/everlight-electronics-co-ltd/19-213SDRC-S259-TR8/1080-1580-1-ND/8535303, Configuration=Standard, Height (Max)=0.70mm, lastupdated="08/03/2023 8:58:11 pm", Lens Size="1.20mm x 0.80mm", Lens Style="Rectangle with Flat Top", Lens Transparency=Clear, Lifecycle Status=Active, Minimum Order=1, Mounting Type="Surface Mount", Package / Case="0603 (1608 Metric)", Packaging=TapeAndReel, Part Number=19-213SDRC/S259/TR8, Part Status=Active, partid=372, price=0.06, Series=-, Size / Dimension="1.60mm L x 0.80mm W", Supplier 1=DigiKey, Viewing Angle=120°, Wavelength - Peak=650nm
D17 D19 D21 D24: library part QTLP630C4TR, "LED GREEN CLEAR 0805 SMD", Current - Test=20mA, Device Package="0805 (2012 Metric)", Lens Color=Colorless, Manufacturer="Everlight Electronics Co Ltd", Millicandela Rating=10mcd, Supplier Device Package=0805, Supplier Part Number 1=1080-1411-1-ND, Voltage - Forward (Vf) (Typ)=2.1V, Color=Green, ComponentLink1Description=Datasheet, ComponentLink1URL=//media.digikey.com/PDF/Data%20Sheets/Everlight%20PDFs/QTLP630-2.pdf, ComponentLink2Description="DigiKey Link", ComponentLink2URL=https://www.digikey.com/en/products/detail/everlight-electronics-co-ltd/QTLP630C4TR/2675902, Configuration=Standard, Height (Max)=1.20mm, lastupdated="08/03/2023 8:58:32 pm", Lens Size="1.40mm x 1.25mm", Lens Style="Rectangle with Flat Top", Lens Transparency=Clear, Lifecycle Status=Active, Minimum Order=1, Mounting Type="Surface Mount", Package / Case="0805 (2012 Metric)", Packaging=TapeAndReel, Part Number=QTLP630C4TR, Part Status=Active, partid=240, price=0.04, Series=-, Size / Dimension="2.00mm L x 1.25mm W", Supplier 1=DigiKey, Viewing Angle=140°, Wavelength - Dominant=570nm, Wavelength - Peak=565nm
D18 D20 D22 D23: "DIODE SCHOTTKY 40V 1A SMB", Current - Average Rectified (Io)=1A, Current - Reverse Leakage @ Vr="1mA @ 40V", Manufacturer="ON Semiconductor", Operating Temperature - Junction="-65°C ~ 125°C", Package / Case="DO-214AA, SMB", Supplier Device Package=SMB, Supplier Part Number 1=MBRS140T3GOSCT-ND, Voltage - DC Reverse (Vr) (Max)=40V, Voltage - Forward (Vf) (Max) @ If="600mV @ 1A", ComponentLink1Description=Datasheet, ComponentLink1URL=https://www.onsemi.com/pub/Collateral/MBRS140T3-D.PDF, ComponentLink2Description="DigiKey Link", ComponentLink2URL=http://digikey.com/product-detail/en/on-semiconductor/MBRS140T3G/MBRS140T3GOSCT-ND/918002, Diode Type=Schottky, lastupdated="08/03/2023 8:53:35 pm", Lifecycle Status=Active, Minimum Order=1, Mounting Type="Surface Mount", Packaging=TapeAndReel, Part Number=MBRS140T3G, Part Status=Active, partid=1387, price=0.08, Series=-, Speed="Fast Recovery =< 500ns, > 200mA (Io)", Supplier 1=DigiKey
J1 J3 J5 J6 J7 J8 J9 J10 J11 J13 J15 J16 J17 J18 J19 J20 J21 J23 J25 J26 J27 J28 J29 J30 J31 J33 J35 J36 J37 J38 J39 J40 J55 J56 J57 J58 J59: "CONN HDR 2POS STACK T/H", Package=None, Availability="In Stock", Check_prices=https://www.snapeda.com/parts/HW-01-11-G-D-209-080/Samtec/view-part/?ref=eda, MF=Samtec, MP=HW-01-11-G-D-209-080, price=None, Purchase-URL=https://pricing.snapeda.com/search/part/HW-01-11-G-D-209-080/?ref=eda, SnapEDA_Link=https://www.snapeda.com/parts/HW-01-11-G-D-209-080/Samtec/view-part/?ref=snap
J2 J4 J12 J14 J22 J24 J32 J34 J41 J42 J43 J44 J45 J46 J47 J48: "2 Position Wire to Board Terminal Block Horizontal with Board 0.138 (3.50mm) Through Hole", Package=None, Availability="In Stock", Check_prices=https://www.snapeda.com/parts/691214110002S/Wurth+Elektronik/view-part/?ref=eda, MF="WÃ¼rth Elektronik", MP=691214110002S, price=None, Purchase-URL=https://pricing.snapeda.com/search/part/691214110002S/?ref=eda, SnapEDA_Link=https://www.snapeda.com/parts/691214110002S/Wurth+Elektronik/view-part/?ref=snap
J49 J50 J51 J52 J53: "2 Position Terminal Block Header, Male Pins, Shrouded (4 Side) 0.197 (5.00mm) Vertical - Through Hole", Package=None, Availability="In Stock", Check_prices=https://www.snapeda.com/parts/691311700102/Wurth+Elektronik/view-part/?ref=eda, MF="WÃ¼rth Elektronik", MP=691311700102, price=None, Purchase-URL=https://pricing.snapeda.com/search/part/691311700102/?ref=eda, SnapEDA_Link=https://www.snapeda.com/parts/691311700102/Wurth+Elektronik/view-part/?ref=snap
J54: Package=None, Availability=Unavailable, MP=TSW-103-26-F-S, price=None
L1 L2 L3 L4: "15 ÂµH Shielded Molded Inductor 3 A 120mOhm Max Nonstandard", Package="Nonstandard Abracon LLC", Check_prices=https://www.snapeda.com/parts/ASPI-0630LR-150M-T15/Abracon+LLC/view-part/?ref=eda, Digi-Key_Part_Number=ASPI-0630LR-150M-T15TR-ND, MF="Abracon LLC", MP=ASPI-0630LR-150M-T15, Purchase-URL=https://pricing.snapeda.com/search/part/ASPI-0630LR-150M-T15/?ref=eda, SnapEDA_Link=https://www.snapeda.com/parts/ASPI-0630LR-150M-T15/Abracon+LLC/view-part/?ref=snap
R1 R2 R3 R4 R5 R6 R7 R8 R9 R10 R11 R12 R13 R14 R15 R16: library part CPF0603B1K0E, "RES SMD 1K OHM 0.1% 1/16W 0603", Device Package="0603 (1608 Metric)", Manufacturer="TE Connectivity Passive Product", Operating Temperature="-55°C ~ 155°C", Power (Watts)="0.063W, 1/16W", Supplier Device Package=0603, Supplier Part Number 1=A119887CT-ND, Temperature Coefficient=±25ppm/°C, Tolerance=±0.1%, ComponentLink1Description=Datasheet, ComponentLink1URL=https://www.te.com/commerce/DocumentDelivery/DDEController?Action=srchrtrv&DocNm=1773200&DocType=DS&DocLang=English, ComponentLink2Description="DigiKey Link", ComponentLink2URL=https://www.digikey.com/en/products/detail/te-connectivity-passive-product/CPF0603B1K0E/2390473, Composition="Thin Film", Height - Seated (Max)="0.022\" (0.55mm)", lastupdated="08/03/2023 8:30:18 pm", Lifecycle Status=Active, Minimum Order=1, Number of Terminations=2, Package / Case="0603 (1608 Metric)", Packaging=TapeAndReel, Part Number=CPF0603B1K0E, Part Status=Active, partid=4877, price=0.09, Resistance="1 kOhms", Series="CPF, Neohm", Size / Dimension="0.061\" L x 0.031\" W (1.55mm x 0.80mm)", Supplier 1=DigiKey
R17 R18 R19 R20 R21 R22 R23 R24 R25 R26 R27 R28 R29 R30 R31 R32: library part RES_422, "1W Thick Film Resistors 200V ±100ppm/℃ ±1% -55℃~+155℃ 422Ω 2512 Chip Resistor - Surface Mount ROHS"
R49: library part RT0603FRE0710KL, "RES SMD 10K OHM 1% 1/10W 0603", Device Package="0603 (1608 Metric)", Manufacturer=Yageo, Operating Temperature="-55°C ~ 155°C", Power (Watts)="0.1W, 1/10W", Supplier Device Package=0603, Supplier Part Number 1=YAG2321CT-ND, Temperature Coefficient=±50ppm/°C, Tolerance=±1%, ComponentLink1Description=Datasheet, ComponentLink1URL=https://www.yageo.com/upload/media/product/productsearch/datasheet/rchip/PYu-RT_1-to-0.01_RoHS_L_11.pdf, ComponentLink2Description="DigiKey Link", ComponentLink2URL=https://www.digikey.com/en/products/detail/yageo/RT0603FRE0710KL/1075040, Composition="Thin Film", Height - Seated (Max)="0.022\" (0.55mm)", lastupdated="08/03/2023 8:30:15 pm", Lifecycle Status=Active, Minimum Order=1, Number of Terminations=2, Package / Case="0603 (1608 Metric)", Packaging=TapeAndReel, Part Number=RT0603FRE0710KL, Part Status=Active, partid=5671, price=0.01, Resistance="10 kOhms", Series=RT, Size / Dimension="0.063\" L x 0.031\" W (1.60mm x 0.80mm)", Supplier 1=DigiKey
R50: library part CRCW0603110KFKEA, "RES SMD 110K OHM 1% 1/10W 0603", Device Package="0603 (1608 Metric)", Manufacturer="Vishay Dale", Operating Temperature="-55°C ~ 155°C", Power (Watts)="0.1W, 1/10W", Ratings=AEC-Q200, Supplier Device Package=0603, Supplier Part Number 1=541-110KHCT-ND, Temperature Coefficient=±100ppm/°C, Tolerance=±1%, ComponentLink1Description=Datasheet, ComponentLink1URL=http://www.vishay.com/docs/20035/dcrcwe3.pdf, ComponentLink2Description="DigiKey Link", ComponentLink2URL=http://digikey.com/product-detail/en/vishay-dale/CRCW0603110KFKEA/541-110KHCT-ND/1180042, Composition="Thick Film", Features="Automotive AEC-Q200", Height - Seated (Max)="0.020\" (0.50mm)", lastupdated="08/03/2023 8:30:07 pm", Lifecycle Status=Active, Minimum Order=1, Number of Terminations=2, Package / Case="0603 (1608 Metric)", Packaging=CutTape, Part Number=CRCW0603110KFKEA, Part Status=Active, partid=7799, price=0.10, Resistance="110 kOhms", Series=CRCW, Size / Dimension="0.061\" L x 0.033\" W (1.55mm x 0.85mm)", Supplier 1=DigiKey
R51 R56: library part RMCF0603FT30K0, "RES 30K OHM 1% 1/10W 0603", Device Package="0603 (1608 Metric)", Manufacturer="Stackpole Electronics Inc", Operating Temperature="-55°C ~ 155°C", Power (Watts)="0.1W, 1/10W", Ratings=AEC-Q200, Supplier Device Package=0603, Supplier Part Number 1=RMCF0603FT30K0CT-ND, Temperature Coefficient=±100ppm/°C, Tolerance=±1%, ComponentLink1Description=Datasheet, ComponentLink1URL=https://www.seielect.com/catalog/sei-rmcf_rmcp.pdf, ComponentLink2Description="DigiKey Link", ComponentLink2URL=https://www.digikey.com/en/products/detail/stackpole-electronics-inc/RMCF0603FT30K0/1760793, Composition="Thick Film", Features="Automotive AEC-Q200", Height - Seated (Max)="0.022\" (0.55mm)", lastupdated="08/03/2023 8:29:57 pm", Lifecycle Status=Active, Minimum Order=1, Number of Terminations=2, Package / Case="0603 (1608 Metric)", Packaging=CutTape, Part Number=RMCF0603FT30K0, Part Status=Active, partid=10655, price=0.01, Resistance="30 kOhms", Series=RMCF, Size / Dimension="0.061\" L x 0.031\" W (1.55mm x 0.80mm)", Supplier 1=DigiKey
R52: library part MCT06030C5600FP500, "RES SMD 560 OHM 1% 1/8W 0603", Device Package="0603 (1608 Metric)", Manufacturer="Vishay Beyschlag", Operating Temperature="-55°C ~ 155°C", Power (Watts)="0.125W, 1/8W", Supplier Device Package=0603, Supplier Part Number 1=MCT0603-560-CFCT-ND, Temperature Coefficient=±50ppm/°C, Tolerance=±1%, ComponentLink1Description=Datasheet, ComponentLink1URL=http://www.vishay.com/docs/28705/mcx0x0xpro.pdf, ComponentLink2Description="DigiKey Link", ComponentLink2URL=http://digikey.com/product-detail/en/vishay-beyschlag/MCT06030C5600FP500/MCT0603-560-CFCT-ND/2607914, Composition="Thin Film", Features=Anti-Sulfur, Height - Seated (Max)="0.022\" (0.55mm)", lastupdated="14/03/2023 7:28:48 pm", Lifecycle Status=Active, Minimum Order=1, Number of Terminations=2, Package / Case="0603 (1608 Metric)", Packaging=TapeAndReel, Part Number=MCT06030C5600FP500, Part Status=Active, partid=14498, price=0.02, Resistance="560 Ohms", Series="MCT - Professional", Size / Dimension="0.061\" L x 0.033\" W (1.55mm x 0.85mm)", Supplier 1=DigiKey
R53: library part CRGP0603F120K, "RES 120K OHM 1% 1/4W 0603", Device Package="0603 (1608 Metric)", Manufacturer="TE Connectivity Passive Product", Operating Temperature="-55°C ~ 155°C", Power (Watts)="0.25W, 1/4W", Supplier Device Package=0603, Supplier Part Number 1=A130441CT-ND, Temperature Coefficient=±100ppm/°C, Tolerance=±1%, ComponentLink1Description=Datasheet, ComponentLink1URL=https://www.te.com/commerce/DocumentDelivery/DDEController?Action=srchrtrv&DocNm=9-1773463-9&DocType=DS&DocLang=English, ComponentLink2Description="DigiKey Link", ComponentLink2URL=https://www.digikey.com/en/products/detail/te-connectivity-passive-product/CRGP0603F120K/8577043, Composition="Thick Film", Features="Pulse Withstanding", Height - Seated (Max)="0.022\" (0.55mm)", lastupdated="08/03/2023 8:30:17 pm", Lifecycle Status=Active, Minimum Order=1, Number of Terminations=2, Package / Case="0603 (1608 Metric)", Packaging=TapeAndReel, Part Number=CRGP0603F120K, Part Status=Active, partid=5040, price=0.02, Resistance="120 kOhms", Series=CRGP, Size / Dimension="0.063\" L x 0.031\" W (1.60mm x 0.80mm)", Supplier 1=DigiKey
R54 R57 R61 R63: library part RNCS0603BKE10K0, "RES 10K OHM 0.1% 1/16W 0603", Device Package="0603 (1608 Metric)", Manufacturer="Stackpole Electronics Inc", Operating Temperature="-55°C ~ 155°C", Power (Watts)="0.063W, 1/16W", Ratings=AEC-Q200, Supplier Device Package=0603, Supplier Part Number 1=RNCS0603BKE10K0CT-ND, Temperature Coefficient=±25ppm/°C, Tolerance=±0.1%, ComponentLink1Description=Datasheet, ComponentLink1URL=https://www.seielect.com/catalog/sei-rncs_rnch.pdf, ComponentLink2Description="DigiKey Link", ComponentLink2URL=https://www.digikey.com/en/products/detail/stackpole-electronics-inc/RNCS0603BKE10K0/1708836, Composition="Thin Film", Features="Anti-Corrosive, Automotive AEC-Q200, Moisture Resistant", Height - Seated (Max)="0.022\" (0.55mm)", lastupdated="08/03/2023 8:30:18 pm", Lifecycle Status=Active, Minimum Order=1, Number of Terminations=2, Package / Case="0603 (1608 Metric)", Packaging=TapeAndReel, Part Number=RNCS0603BKE10K0, Part Status=Active, partid=4838, price=0.07, Resistance="10 kOhms", Series=RNCS, Size / Dimension="0.061\" L x 0.031\" W (1.55mm x 0.80mm)", Supplier 1=DigiKey
R55: library part RK73H1JTTD1650F, "RES 165 OHM 1% 1/8W 0603", Device Package="0603 (1608 Metric)", Manufacturer="KOA Speer Electronics, Inc.", Operating Temperature="-55°C ~ 155°C", Power (Watts)="0.125W, 1/8W", Ratings=AEC-Q200, Supplier Device Package=0603, Supplier Part Number 1=2019-RK73H1JTTD1650FCT-ND, Temperature Coefficient=±100ppm/°C, Tolerance=±1%, ComponentLink1Description=Datasheet, ComponentLink1URL=http://www.koaspeer.com/catimages/Products/RK73H/RK73H.pdf, ComponentLink2Description="DigiKey Link", ComponentLink2URL=https://www.digikey.com/en/products/detail/koa-speer-electronics-inc/RK73H1JTTD1650F/9845302, Composition="Thick Film", Features="Automotive AEC-Q200, Moisture Resistant", Height - Seated (Max)="0.022\" (0.55mm)", lastupdated="14/03/2023 7:29:07 pm", Lifecycle Status=Active, Minimum Order=1, Number of Terminations=2, Package / Case="0603 (1608 Metric)", Packaging=CutTape, Part Number=RK73H1JTTD1650F, Part Status=Active, partid=8816, price=0.01, Resistance="165 Ohms", Series=RK73H, Size / Dimension="0.063\" L x 0.031\" W (1.60mm x 0.80mm)", Supplier 1=DigiKey
R58: library part CRGP0603F27K, "RES 27K OHM 1% 1/4W 0603", Device Package="0603 (1608 Metric)", Manufacturer="TE Connectivity Passive Product", Operating Temperature="-55°C ~ 155°C", Power (Watts)="0.25W, 1/4W", Supplier Device Package=0603, Supplier Part Number 1=A130433CT-ND, Temperature Coefficient=±100ppm/°C, Tolerance=±1%, ComponentLink1Description=Datasheet, ComponentLink1URL=https://www.te.com/commerce/DocumentDelivery/DDEController?Action=srchrtrv&DocNm=9-1773463-9&DocType=DS&DocLang=English, ComponentLink2Description="DigiKey Link", ComponentLink2URL=https://www.digikey.com/en/products/detail/te-connectivity-passive-product/CRGP0603F27K/8577035, Composition="Thick Film", Features="Pulse Withstanding", Height - Seated (Max)="0.022\" (0.55mm)", lastupdated="08/03/2023 8:30:17 pm", Lifecycle Status=Active, Minimum Order=1, Number of Terminations=2, Package / Case="0603 (1608 Metric)", Packaging=TapeAndReel, Part Number=CRGP0603F27K, Part Status=Active, partid=5007, price=0.02, Resistance="27 kOhms", Series=CRGP, Size / Dimension="0.063\" L x 0.031\" W (1.60mm x 0.80mm)", Supplier 1=DigiKey
R59: library part RQ73C1J866RBTD, "RES 866 OHMS 0.1% 0.15W 0603", Device Package="0603 (1608 Metric)", Manufacturer="TE Connectivity Passive Product", Operating Temperature="-55°C ~ 155°C", Power (Watts)=0.15W, Ratings=AEC-Q200, Supplier Device Package=0603, Supplier Part Number 1=A139965CT-ND, Temperature Coefficient=±10ppm/°C, Tolerance=±0.1%, ComponentLink1Description=Datasheet, ComponentLink1URL=//media.digikey.com/pdf/Data%20Sheets/Tyco%20Electronics%20P%20B%20PDFs/RQ73-0618%20v2.pdf, ComponentLink2Description="DigiKey Link", ComponentLink2URL=https://www.digikey.com/en/products/detail/te-connectivity-passive-product/RQ73C1J866RBTD/9479913, Composition="Thin Film", Features="Anti-Sulfur, Automotive AEC-Q200", Height - Seated (Max)="0.024\" (0.60mm)", lastupdated="14/03/2023 7:29:08 pm", Lifecycle Status=Active, Minimum Order=1, Number of Terminations=2, Package / Case="0603 (1608 Metric)", Packaging=TapeAndReel, Part Number=RQ73C1J866RBTD, Part Status=Active, partid=8503, price=0.26, Resistance="866 Ohms", Series=RQ73, Size / Dimension="0.061\" L x 0.031\" W (1.55mm x 0.80mm)", Supplier 1=DigiKey
R60: library part RMCF0603FT62K0, "RES 62K OHM 1% 1/10W 0603", Device Package="0603 (1608 Metric)", Manufacturer="Stackpole Electronics Inc", Operating Temperature="-55°C ~ 155°C", Power (Watts)="0.1W, 1/10W", Ratings=AEC-Q200, Supplier Device Package=0603, Supplier Part Number 1=RMCF0603FT62K0CT-ND, Temperature Coefficient=±100ppm/°C, Tolerance=±1%, ComponentLink1Description=Datasheet, ComponentLink1URL=https://www.seielect.com/catalog/sei-rmcf_rmcp.pdf, ComponentLink2Description="DigiKey Link", ComponentLink2URL=https://www.digikey.com/en/products/detail/stackpole-electronics-inc/RMCF0603FT62K0/1714175, Composition="Thick Film", Features="Automotive AEC-Q200", Height - Seated (Max)="0.022\" (0.55mm)", lastupdated="08/03/2023 8:29:57 pm", Lifecycle Status=Active, Minimum Order=1, Number of Terminations=2, Package / Case="0603 (1608 Metric)", Packaging=CutTape, Part Number=RMCF0603FT62K0, Part Status=Active, partid=10723, price=0.01, Resistance="62 kOhms", Series=RMCF, Size / Dimension="0.061\" L x 0.031\" W (1.55mm x 0.80mm)", Supplier 1=DigiKey
R62: library part MCT06030C1100FP500, "RES 110 OHM 1% 1/8W 0603", Device Package="0603 (1608 Metric)", Manufacturer="Vishay Beyschlag", Operating Temperature="-55°C ~ 155°C", Power (Watts)="0.125W, 1/8W", Supplier Device Package=0603, Supplier Part Number 1=749-MCT06030C1100FP500CT-ND, Temperature Coefficient=±50ppm/°C, Tolerance=±1%, ComponentLink1Description=Datasheet, ComponentLink1URL=http://www.vishay.com/docs/28705/mcx0x0xpro.pdf, ComponentLink2Description="DigiKey Link", ComponentLink2URL=http://digikey.com/product-detail/en/vishay-beyschlag/MCT06030C1100FP500/749-MCT06030C1100FP500CT-ND/10453856, Composition="Thin Film", Features=Anti-Sulfur, Height - Seated (Max)="0.022\" (0.55mm)", lastupdated="14/03/2023 7:29:21 pm", Lifecycle Status=Active, Minimum Order=1, Number of Terminations=2, Package / Case="0603 (1608 Metric)", Packaging=TapeAndReel, Part Number=MCT06030C1100FP500, Part Status=Active, partid=5092, price=0.02, Resistance="110 Ohms", Series="MCT - Professional", Size / Dimension="0.061\" L x 0.033\" W (1.55mm x 0.85mm)", Supplier 1=DigiKey
R64 R66: library part ERJ-PB3D4750V, "RES SMD 475 OHM 0.5% 1/5W 0603", Device Package="0603 (1608 Metric)", Manufacturer="Panasonic Electronic Components", Operating Temperature="-55°C ~ 155°C", Power (Watts)="0.2W, 1/5W", Ratings=AEC-Q200, Supplier Device Package=0603, Supplier Part Number 1=P20246CT-ND, Temperature Coefficient=±50ppm/°C, Tolerance=±0.5%, ComponentLink1Description=Datasheet, ComponentLink1URL=https://industrial.panasonic.com/cdbs/www-data/pdf/RDM0000/AOA0000C328.pdf, ComponentLink2Description="DigiKey Link", ComponentLink2URL=http://digikey.com/product-detail/en/panasonic-electronic-components/ERJ-PB3D4750V/P20246CT-ND/6214501, Composition="Thick Film", Features="Automotive AEC-Q200, Pulse Withstanding", Height - Seated (Max)="0.022\" (0.55mm)", lastupdated="08/03/2023 8:30:10 pm", Lifecycle Status=Active, Minimum Order=1, Number of Terminations=2, Package / Case="0603 (1608 Metric)", Packaging=TapeAndReel, Part Number=ERJ-PB3D4750V, Part Status=Active, partid=7092, price=0.02, Resistance="475 Ohms", Series=ERJ, Size / Dimension="0.063\" L x 0.031\" W (1.60mm x 0.80mm)", Supplier 1=DigiKey
R65: library part RK73H1JTTD1400F, "RES 140 OHM 1% 1/8W 0603", Device Package="0603 (1608 Metric)", Manufacturer="KOA Speer Electronics, Inc.", Operating Temperature="-55°C ~ 155°C", Power (Watts)="0.125W, 1/8W", Ratings=AEC-Q200, Supplier Device Package=0603, Supplier Part Number 1=2019-RK73H1JTTD1400FCT-ND, Temperature Coefficient=±100ppm/°C, Tolerance=±1%, ComponentLink1Description=Datasheet, ComponentLink1URL=http://www.koaspeer.com/catimages/Products/RK73H/RK73H.pdf, ComponentLink2Description="DigiKey Link", ComponentLink2URL=https://www.digikey.com/en/products/detail/koa-speer-electronics-inc/RK73H1JTTD1400F/9845188, Composition="Thick Film", Features="Automotive AEC-Q200, Moisture Resistant", Height - Seated (Max)="0.022\" (0.55mm)", lastupdated="08/03/2023 8:30:04 pm", Lifecycle Status=Active, Minimum Order=1, Number of Terminations=2, Package / Case="0603 (1608 Metric)", Packaging=CutTape, Part Number=RK73H1JTTD1400F, Part Status=Active, partid=8740, price=0.01, Resistance="140 Ohms", Series=RK73H, Size / Dimension="0.063\" L x 0.031\" W (1.60mm x 0.80mm)", Supplier 1=DigiKey
S1 S2 S3 S4 S5 S6 S7 S8 S9 S10 S11 S12 S13 S14 S15 S16: "Dip Switch SPST 1 Position Surface Mount Slide (Standard) Actuator 25mA 24VDC", Package=None, Availability="In Stock", Check_prices=https://www.snapeda.com/parts/KAE01SGGT/E-Switch/view-part/?ref=eda, MF=E-Switch, MP=KAE01SGGT, price=None, Purchase-URL=https://pricing.snapeda.com/search/part/KAE01SGGT/?ref=eda, SnapEDA_Link=https://www.snapeda.com/parts/KAE01SGGT/E-Switch/view-part/?ref=snap
U1 U2 U3 U4: "Buck Switching Regulator IC Positive Adjustable 1V 1 Output 3A 8-SOIC (0.154, 3.90mm Width) Exposed Pad", Package="SOIC-8 Rohm", Availability=Bad, MF=Rohm, MP=BD9876AEFJ-E2, price=None, SnapEDA_Link=https://www.snapeda.com/parts/BD9876AEFJ-E2/Rohm/view-part/78992/?ref=snap
U7: "1x4P XA 1 2.5mm 4 Copper Alloy Plugin,P=2.5mm Wire To Board / Wire To Wire Connector ROHS"
VR17: "500 kOhms 0.5W, 1/2W Gull Wing Surface Mount Trimmer Potentiometer Cermet 1.0 Turn Top Adjustment", Package="3361P Bourns", Check_prices=https://www.snapeda.com/parts/3361P-1-504GLF/Bourns/view-part/?ref=eda, Digi-Key_Part_Number=3361P-1-504GLFTR-ND, MF=Bourns, MP=3361P-1-504GLF, Purchase-URL=https://pricing.snapeda.com/search/part/3361P-1-504GLF/?ref=eda, SnapEDA_Link=https://www.snapeda.com/parts/3361P-1-504GLF/Bourns/view-part/?ref=snap

## Via types
v1: diameter 1.2, hole 0.7, Top Layer to Bottom Layer, 51 vias
v2: diameter 1, hole 0.6, Top Layer to Bottom Layer, 13 vias
v3: diameter 0.7, hole 0.4, Top Layer to Bottom Layer, 8 vias
v4: diameter 0.711, hole 0.5, Top Layer to Bottom Layer, 6 vias
v5: diameter 1.2, hole 0.6, Top Layer to Bottom Layer, 5 vias
v6: diameter 4, hole 3.1, Top Layer to Bottom Layer, 4 vias
v7: diameter 0.7, hole 0.5, Top Layer to Bottom Layer, 3 vias
v8: diameter 0.8, hole 0.5, Top Layer to Bottom Layer, 2 vias
v9: diameter 0.9, hole 0.5, Top Layer to Bottom Layer, 2 vias
v10: diameter 1.5, hole 0.7, Top Layer to Bottom Layer, 1 vias
v11: diameter 0.8, hole 0.4, Top Layer to Bottom Layer, 1 vias

## Nets (pads, with @x,y where several pads share a name; then routed paths per layer and width w, separated by ;. In a path a pad name is that pad's centre, name@x,y a point inside that pad or via, vN(x,y) a via of type N, cw(c..) or ccw(c..) an arc to the next point about the centre after c; other vN are vias at no path point)
+3.3V: C14.2 C17.2 C18.2 C19.2 J59.02 L4.1 R60.2 R62.2 R64.2 U6.8 | length 49.8
  Top Layer w0.8: v5(42.375,41.175) v5@42.375,41.229 ; C18.2@43.475,43.69 C18.2@43.525,43.74 ; C17.2@43.525,45.615 43.525,45.565 43.575,45.515 45.453,45.515 U6.8@45.482,45.486
  Top Layer w0.9: v1(40.1,61.775) 40.127,61.775 40.177,61.725 R62.2@41.4,61.725 R60.2@41.4,63.55 ; v2(41.2,49.525) 41.227,49.525 41.352,49.4 R64.2@42.675,49.4
  Top Layer w1: C14.2@38.098,65.073 38.15,65.021 v1@38.15,63.65 ; C14.2@38.125,65.1 v1@38.125,68.15 ; 43.475,42.329 C18.2@43.475,43.69 ; C18.2@43.525,43.74 C17.2@43.525,45.565 ; C17.2@43.525,45.615 C19.2@43.525,47.315
  Top Layer w1.2: v1(38.175,63.625) 38.175,49.625 v5(40.575,47.225) ; v5@42.16,85.26 J59.02@42.16,88.35 ; v1(42.35,79.175) 45.689,79.175 49.85,75.014 49.85,74.125 50.425,73.55 L4.1@51,73.55 ; v5@42.375,41.229 43.475,42.329
  other v1: 38.175,61.7 38.15,68.175
  other v5: 42.15,85.25
+5V: C6.2 J58.02 L2.1 R53.1 R55.2 | length 10.7
  Top Layer w0.7: L2.1@44.475,31 L2.1@45,30.475 ; R53.1@45.28,18.94 47,18.94 v4(47,19)
  Top Layer w0.9: J58.02@42.303,11.553 v2(45.425,11.553) ; R55.2@47.25,15.3 48.825,15.3 v9(48.85,15.325)
  Top Layer w1: C6.2@48.375,17.3 v2(49.846,17.3)
  Top Layer w1.2: v5(45,28.5) L2.1@45,30.475